# EAGLE board PSD_Mount_PCB_v3 (EAGLE 9.7.0)

Size 40.64 x 40.64 mm. Coordinates in mm from the lower left corner, seen from the top.
Outline: 0,0 40.64,0 40.64,40.64 0,40.64 0,0
Outline: circle at 4.06,4.06 radius 2.08
Outline: circle at 36.58,4.06 radius 2.08
Outline: circle at 36.58,36.58 radius 2.08
Outline: circle at 4.06,36.58 radius 2.08
Copper layers (1*16): Top 0.035mm / dielectric 1.5mm / Bottom 0.035mm
Design rules "default *": minimum track width 6mil, minimum drill 0.35mm, track to track 8mil, track to pad 8mil, pad to pad 8mil, via to via 8mil, smd to smd 8mil, copper to edge 40mil, drill to drill 6mil, minimum pad ring 10mil, minimum via ring 8mil, stop-mask expansion 4mil, vias tented up to drill 0mil, thermal gap 10mil
Net classes: 0 p: width 0.254 mm; 1 10 mil: width 0.254 mm

## Footprints (pad centres in the part's own frame; a part is rotated, then mirrored left to right if it is on the bottom)
SOP65P640X120-14N = smd 1.57 x 0.41: 1 -2.87,1.95; 2 -2.87,1.3; 3 -2.87,0.65; 4 -2.87,0; 5 -2.87,-0.65; 6 -2.87,-1.3; 7 -2.87,-1.95; 8 2.87,-1.95; 9 2.87,-1.3; 10 2.87,-0.65; 11 2.87,0; 12 2.87,0.65; 13 2.87,1.3; 14 2.87,1.95
0603 = smd 1 x 1.1: 1 -0.85,0; 2 0.85,0
CONN_332LF_AMP = drill 0.635 pad 1.143: 1 0,0; 2 0,2.54; 3 2.54,0; 4 2.54,2.54; 5 5.08,0; 6 5.08,2.54; 7 7.62,0; 8 7.62,2.54
2L10UV_SU7 = drill 0.55 long: X1-1 12.7,-5.08; X1-2 12.7,-7.62; Y1-1 12.7,7.62; Y1-2 12.7,5.08 | drill 0.6 long: X2-1 -12.7,7.62; X2-2 -12.7,5.08; Y2-1 -12.7,-5.08; Y2-2 -12.7,-7.62

## Placement (x,y rotation side)
AMP1  OPA4140  [SOP65P640X120-14N]  20.32,20.32 0 top
C1  [0603]  14.66,20.32 0 top
C2  [0603]  25.91,20.32 180 top
C3  [0603]  26.29,18.65 180 top
C4  [0603]  14.37,18.76 0 top
J1  75869-332LF  [CONN_332LF_AMP]  16.51,6.35 0 top
R25  [0603]  18.32,24.2 180 top
R26  [0603]  26.29,15.35 0 top
R27  [0603]  14.61,21.86 180 top
R28  [0603]  22.1,14.79 0 top
R30  [0603]  26.29,17.09 180 top
R31  [0603]  22.06,16.48 0 top
R32  [0603]  22.38,24.23 180 top
R33  [0603]  14.22,15.6 0 top
R34  [0603]  18.78,16.44 180 top
R35  [0603]  18.81,14.77 0 top
R36  [0603]  14.28,17.14 0 top
R38  [0603]  25.91,21.92 180 top
U$1  2L10UV_SU7  [2L10UV_SU7]  20.32,20.32 0 bottom

## Library data of the parts
AMP1 = OPA4140
C1-C4 R25-R28 R30-R36 R38 = rlc-jqi
J1 = 75869-332LF; BUILT_BY: EMA_Matt; COPYRIGHT: Copyright (C) 2018 Accelerated Designs. All rights reserved; MANUFACTURER_PART_NUMBER: 75869-332LF; SOURCELIBRARY: Amphenol_2019-10-30; VENDOR: Amphenol
U$1 = 2L10UV-MP1

## Nets
15V: AMP1.4 C1.2 J1.7 R35.1 R36.1 R38.1
-15V: AMP1.11 C2.2 J1.8 R26.2 R27.2 R28.2
BIASX: AMP1.5 AMP1.12 C4.2 R33.2 R36.2
BIASY: AMP1.3 AMP1.10 C3.2 R26.1 R30.2
GND: C1.1 C2.1 C3.1 C4.1 J1.1 J1.6 R30.1 R33.1
X1: AMP1.6 R34.1 R35.2 U$1.X1-1 U$1.X1-2
X1_OUT: AMP1.7 J1.5 R34.2
X2: AMP1.13 R32.2 R38.2 U$1.X2-1 U$1.X2-2
X2_OUT: AMP1.14 J1.4 R32.1
Y1: AMP1.2 R25.1 R27.1 U$1.Y1-1 U$1.Y1-2
Y1_OUT: AMP1.1 J1.2 R25.2
Y2: AMP1.9 R28.1 R31.1 U$1.Y2-1 U$1.Y2-2
Y2_OUT: AMP1.8 J1.3 R31.2

## Tracks (layer width: path | path; a pad name or v marks a point on that pad's centre or on a via)
15V  (5 unrouted)
-15V  (5 unrouted)
BIASX  (4 unrouted)
BIASY  (4 unrouted)
GND  (7 unrouted)
X1  (4 unrouted)
X1_OUT  (2 unrouted)
X2  (3 unrouted)
X2_OUT  (2 unrouted)
Y1  (3 unrouted)
Y1_OUT  (2 unrouted)
Y2  (4 unrouted)
Y2_OUT  (2 unrouted)